# Altium PCB MC_SunSensorPCB.PcbDoc (part 2 of 2)
Units mm, origin at the board's own origin, x right, y up, seen from the top; angles counter-clockwise.
Board outline 90.17 x 95.88 mm, 4 copper layers (F.Cu, In1.Cu, In2.Cu, B.Cu); 111 components, 182 nets, 555 pads, 174 vias.
Unrouted connection lines stored in the file: 3.
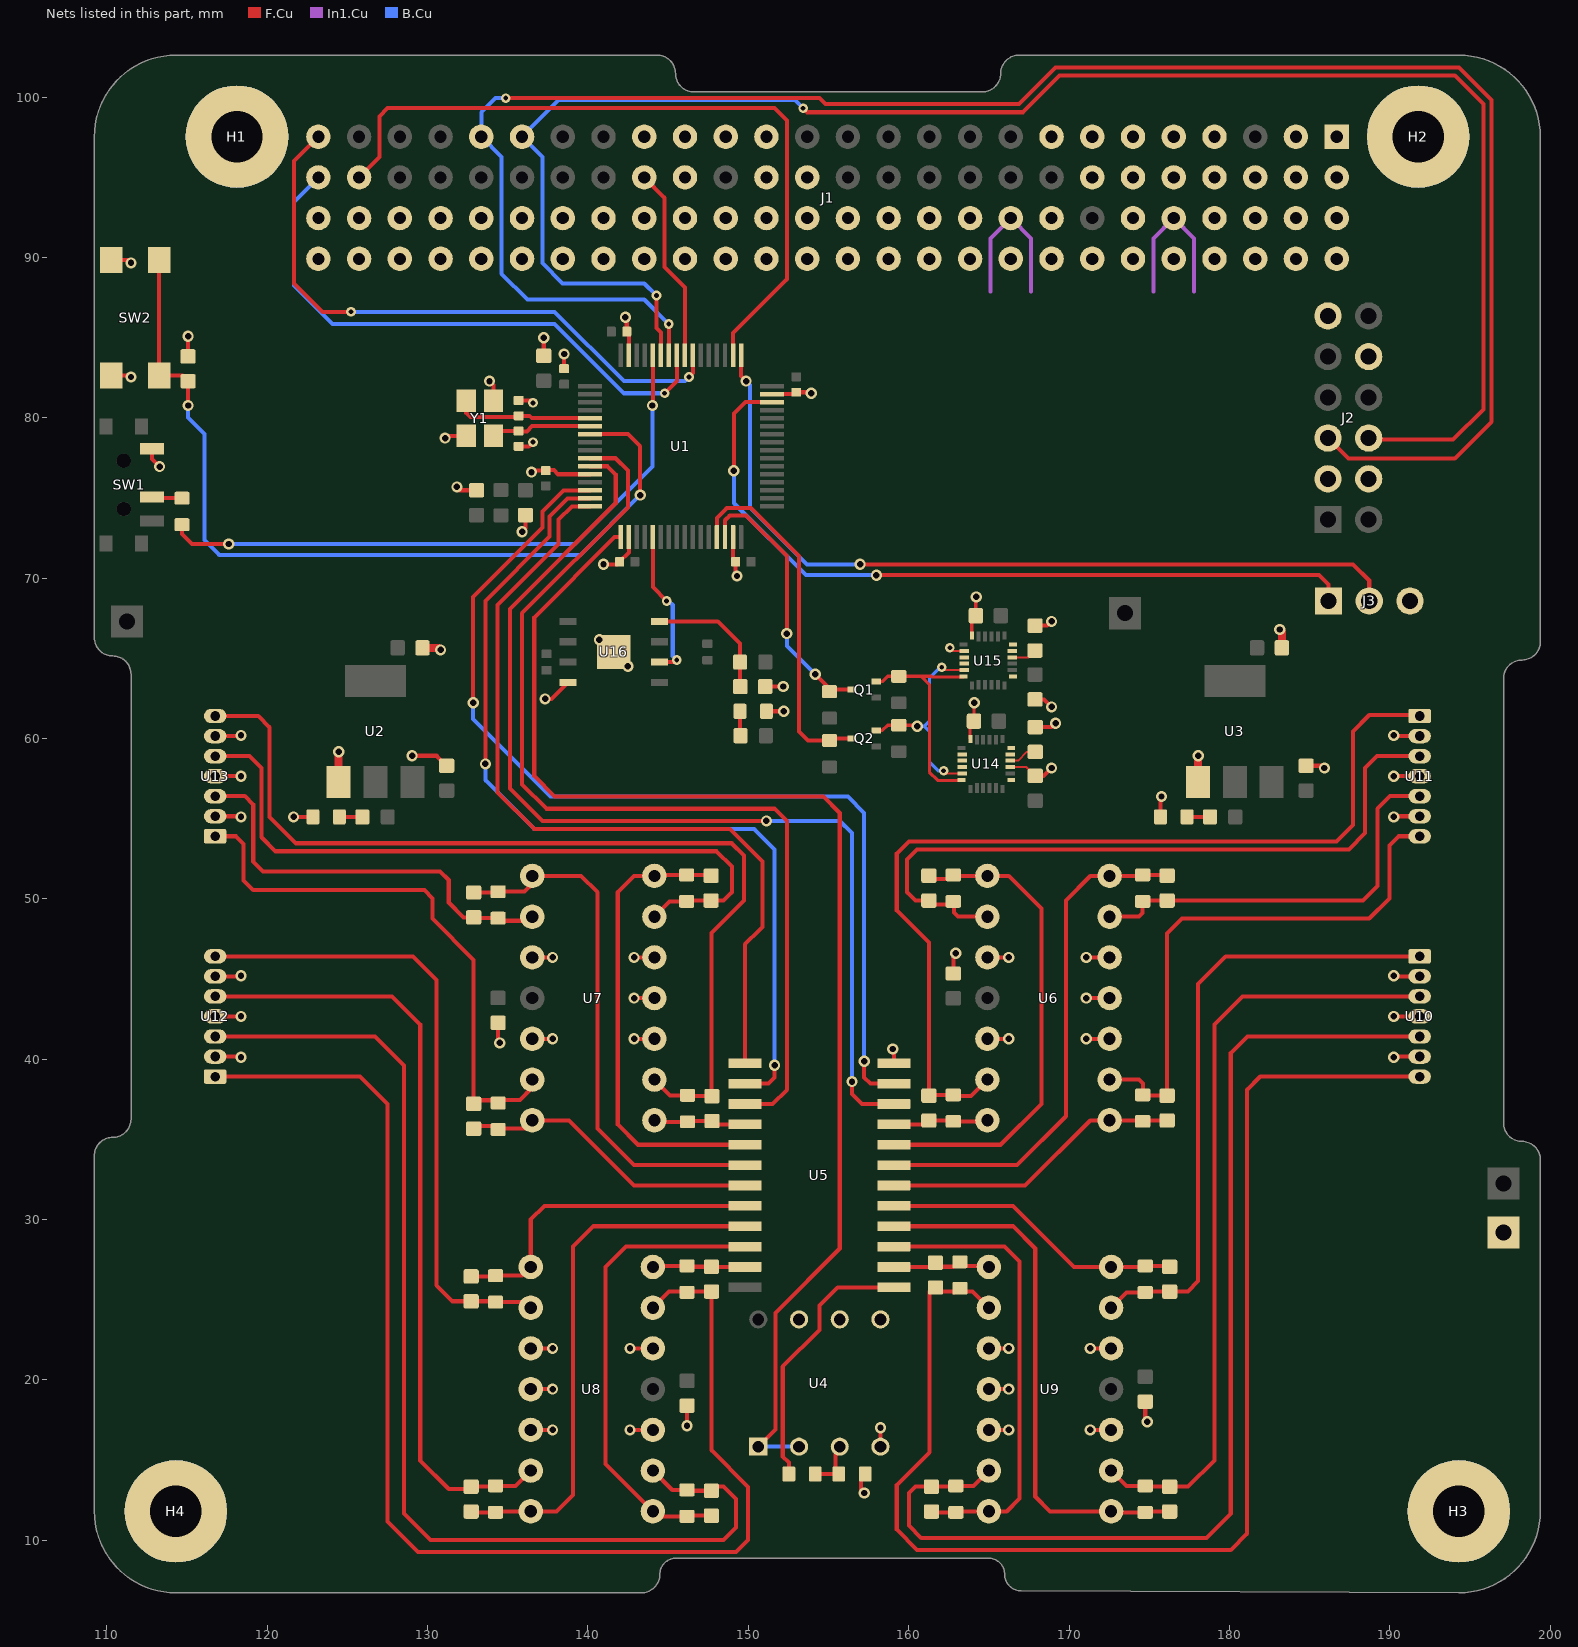
[diagram p4: the nets of this part, all layers, seen from the top]

## Via types
v1: diameter 0.7, hole 0.4, F.Cu to B.Cu, tented both sides, 140 vias
v2: diameter 0.6, hole 0.3, F.Cu to B.Cu, tented both sides, 34 vias

## Nets (pads, with @x,y where several pads share a name; then routed paths per layer and width w, separated by ;. In a path a pad name is that pad's centre, name@x,y a point inside that pad or via, vN(x,y) a via of type N, cw(c..) or ccw(c..) an arc to the next point about the centre after c; other vN are vias at no path point) (continued)
ADCS_SPI_MRAM_SCK: U1.21 U16.6 | length 9.5
  F.Cu w0.25: U16.6@144.455,64.763 145.415,64.763 v2(145.542,64.89)
  F.Cu w0.254: U1.21@144.046,72.555 144.046,69.434 v2(144.907,68.573)
  B.Cu w0.254: v2(144.907,68.573) 145.034,68.573 145.288,68.319 145.288,65.144 v2(145.542,64.89)
ADCS_SPI_MTR_CSN: J1.50 U1.50 | length 46.3
  F.Cu w0.254: J1.50@125.73,94.989 127,96.259 127,98.799 127.508,99.307 151.638,99.307 152.4,98.545 152.4,88.639 149.046,85.285 U1.50@149.046,83.895
ADCS_SPI_MTR_MISO: J1.36 U1.56 | length 12.1
  F.Cu w0.254: J1.36@143.51,94.989 144.78,93.719 144.78,89.401 146.046,88.135 U1.56@146.046,83.895
ADCS_SPI_MTR_MOSI: J1.52 U1.57 | length 35.9
  F.Cu w0.254: v2(144.78,81.527) 145.546,82.293 U1.57@145.546,83.895
  B.Cu w0.254: J1.52@123.19,94.989 121.666,93.465 121.666,88.258 124.079,85.845 137.922,85.845 142.24,81.527 v2(144.78,81.527)
ADCS_SPI_MTR_SCK: J1.51 U1.55 | length 38.5
  F.Cu w0.254: J1.51@123.19,97.529 121.666,96.005 121.666,88.385 123.444,86.607 v2(125.222,86.607) ; v2(146.304,82.543) 146.546,82.785 U1.55@146.546,83.895
  B.Cu w0.254: v2(125.222,86.607) 137.922,86.607 142.24,82.289 146.05,82.289 v2(146.304,82.543)
BOOT0: R1.2 U1.60 | length 39.1
  F.Cu w0.254: R1.2@114.681,73.336 114.681,72.764 115.316,72.129 v1(117.602,72.129) ; v1(144.018,80.765) 144.046,80.793 U1.60@144.046,83.895
  B.Cu w0.254: v1(117.602,72.129) 139.192,72.129 140.716,73.653 144.018,76.955 v1(144.018,80.765)
GND: C1.2 C2.2 C3.2 C4.2 C5.2 C6.2 C7.2 C8.2 C9.1 C10.2 C11.2 C12.2 C13.2 C14.2 C15.2 C16.2 C17.2 C22.2 C23.2 C24.2 C37.2 C38.2 C39.2 C40.2 C41.2 C42.2 C43.2 J1.61 J1.66 J1.69 J1.73 J1.74 J1.81 J1.82 J1.84 J1.99 J1.100 J2.3 J2.4 J2.11 J3.3 R2.1 R4.2 R5.1 R26.2 SW1.1 SW2.3 SW2.4 TP1.1 U1.12 U1.18 U1.31 U1.47 U1.63 U2.1 U3.1 U4.4 U5.12 U6.3 U6.5 U6.10 U6.11 U6.12 U7.3 U7.5 U7.10 U7.11 U7.12 U8.3 U8.5 U8.10 U8.11 U8.12 U9.3 U9.5 U9.10 U9.11 U9.12 U10.2 U10.4 U10.6 U11.2 U11.4 U11.6 U12.2 U12.4 U12.6 U13.2 U13.4 U13.6 U14.9 U14.18 U14.20 U15.18 U15.20 U16.4 U16.9 Y1.2 Y1.4 | length 131.9
  F.Cu w0.127: v2(162.573,65.652) 162.763,65.461 U15.20@163.464,65.461 ; U14.9@166.346,58.213 167.345,58.213 C39.2@167.894,57.664
  F.Cu w0.2: U14.18@163.821,59.965 163.821,60.83 C37.2@164.071,61.08 164.071,62.21 v1(164.084,62.223) ; U15.18@163.939,66.414 C38.2@163.939,67.405 ; C38.2@164.189,67.656 164.189,68.805 v1(164.211,68.827)
  F.Cu w0.25: v1(137.329,62.466) 137.728,62.466 U16.4@138.755,63.493
  F.Cu w0.254: SW2.3@110.26,82.634 111.414,82.635 v1(111.506,82.543) ; SW2.4@110.26,89.834 111.327,89.834 v1(111.506,89.655) ; SW1.1@112.809,78.062 112.809,77.43 v1(113.284,76.955) ; C1.2@115.062,83.826 v1(115.062,85.083) ; U12.2@116.748,40.165 118.324,40.165 v1(118.364,40.125) ; U12.4@116.748,42.665 v1(118.364,42.665) ; U12.6@116.748,45.165 118.324,45.165 v1(118.364,45.205) ; U13.2@116.748,55.151 118.324,55.151 v1(118.364,55.111) ; U13.4@116.748,57.651 v1(118.364,57.651) ; U13.6@116.748,60.151 118.324,60.151 v1(118.364,60.191) ; v1(121.641,55.111) R2.1@122.848,55.111 ; v1(129.032,58.921) 130.569,58.921 C6.2@131.191,58.299 ; v1(131.089,78.733) 131.222,78.866 Y1.4@132.412,78.866 ; v1(131.826,75.685) 132.031,75.48 C14.2@133.051,75.48 ; v1(133.858,82.289) 134.112,82.035 Y1.2@134.112,81.066 ; C22.2@134.398,42.271 134.398,41.109 v1(134.493,41.014) ; C10.2@135.675,78.216 136.309,78.216 v2(136.573,78.479) ; C13.2@135.675,81.081 136.42,81.081 v2(136.573,80.928) ; v1(135.89,72.891) 136.099,73.1 C12.2@136.099,73.93 ; U8.12@136.43,16.884 v1(137.795,16.884) ; U8.11@136.43,19.424 v1(137.795,19.424) ; U8.10@136.43,21.964 v1(137.795,21.964) ; v1(136.48,76.61) 136.579,76.709 C11.2@137.369,76.709 137.397,76.737 137.877,76.737 138.139,76.475 U1.12@140.126,76.475 ; U7.3@136.525,41.268 v1(137.795,41.268) ; U7.5@136.525,46.348 v1(137.795,46.348) ; C2.2@137.242,83.862 v1(137.242,84.992) ; C8.2@138.512,83.059 v1(138.512,83.976) ; v1(140.97,70.859) 141.806,70.859 C7.2@141.969,71.022 141.969,71.032 142.546,71.609 U1.18@142.546,72.555 ; v1(142.333,86.262) 142.421,86.174 C3.2@142.421,85.373 142.546,85.248 U1.63@142.546,83.895 ; v1(142.621,16.884) U8.5@144.05,16.884 ; v1(142.621,21.964) U8.3@144.05,21.964 ; v1(142.875,41.268) U7.10@144.145,41.268 ; v1(142.875,43.808) U7.11@144.145,43.808 ; v1(142.875,46.348) U7.12@144.145,46.348 ; v1(146.177,17.138) C23.2@146.177,18.395 ; U1.31@149.046,72.555 149.046,71.184 C5.2@149.208,71.022 149.208,70.221 v1(149.296,70.133) ; C43.2@151.048,63.239 v1(152.178,63.239) ; R26.2@151.129,61.696 v1(152.209,61.696) ; U1.47@151.466,81.475 152.874,81.475 C4.2@152.99,81.591 153.86,81.591 v1(153.924,81.527) ; R4.2@157.035,14.132 157.035,13.138 v1(157.226,12.947) ; U4.4@158.242,15.835 v1(158.242,17.011) ; v1(159.004,40.633) 159.072,40.565 U5.12@159.072,39.744 ; C17.2@162.783,45.345 162.783,46.444 v1(162.941,46.602) ; U6.3@164.91,41.268 v1(166.243,41.268) ; U6.5@164.91,46.348 v1(166.243,46.348) ; U9.12@165.005,16.884 v1(166.243,16.884) ; U9.11@165.005,19.424 v1(166.243,19.424) ; U9.10@165.005,21.964 v1(166.243,21.964) ; C40.2@167.885,62.436 168.444,62.435 v1(168.91,61.969) ; C42.2@167.885,67.034 168.641,67.034 v1(168.91,67.303) ; C39.2@167.894,57.664 168.415,57.664 v1(168.91,58.159) ; C41.2@167.894,60.712 168.923,60.712 v1(169.164,60.953) ; v1(171.069,41.268) U6.10@172.53,41.268 ; v1(171.069,43.808) U6.11@172.53,43.808 ; v1(171.069,46.348) U6.12@172.53,46.348 ; v1(171.323,16.884) U9.5@172.625,16.884 ; v1(171.323,21.964) U9.3@172.625,21.964 ; C24.2@174.752,18.649 174.752,17.519 v1(174.879,17.392) ; R5.1@175.705,55.111 175.705,56.318 v1(175.768,56.381) ; C15.2@184.785,58.299 185.788,58.299 v1(185.928,58.159) ; v1(190.246,40.125) 190.286,40.165 U10.6@191.862,40.165 ; v1(190.246,42.665) U10.4@191.862,42.665 ; v1(190.246,45.205) 190.286,45.165 U10.2@191.862,45.165 ; v1(190.246,55.111) 190.286,55.151 U11.6@191.862,55.151 ; v1(190.246,57.651) U11.4@191.862,57.651 ; v1(190.246,60.191) 190.286,60.151 U11.2@191.862,60.151
  F.Cu w0.508: U2.1@124.446,57.295 124.446,59.161 v1(124.46,59.175) ; C9.1@129.68,65.652 130.683,65.652 v1(130.81,65.525) ; U3.1@178.04,57.295 178.04,58.907 v1(178.054,58.921) ; v1(183.134,66.795) 183.274,66.655 C16.2@183.274,65.652
  In1.Cu w0.254: 165.1,87.877 165.1,91.179 J1.69@166.37,92.449 167.64,91.179 167.64,87.877 ; 175.26,87.877 175.26,91.179 J1.61@176.53,92.449 177.8,91.179 177.8,87.877
  other v1: 142.494,64.509 140.716,66.16
I2C1_SCL: J1.43 J2.5 U1.58 | length 121.3
  F.Cu w0.254: v2(134.874,99.934) 154.432,99.934 154.805,99.561 166.878,99.561 169.164,101.847 194.31,101.847 196.342,99.815 196.342,79.749 194.056,77.463 187.415,77.463 J2.5@186.145,78.733 ; v2(145.034,85.845) 145.046,85.833 U1.58@145.046,83.895
  B.Cu w0.254: v2(134.874,99.934) 134.231,99.934 133.35,99.053 J1.43@133.35,97.529 134.62,96.259 134.62,88.978 136.229,87.369 143.51,87.369 v2(145.034,85.845)
I2C1_SDA: J1.41 J2.6 U1.59 | length 110.1
  F.Cu w0.254: v2(144.272,87.623) 144.272,85.591 144.546,85.317 U1.59@144.546,83.895 ; v2(153.416,99.307) 153.67,99.053 167.132,99.053 169.418,101.339 194.056,101.339 195.834,99.561 195.834,80.511 193.954,78.631 J2.6@188.685,78.631
  B.Cu w0.254: v2(144.272,87.623) 143.51,88.385 138.414,88.385 137.16,89.639 137.16,96.259 J1.41@135.89,97.529 138.176,99.815 152.908,99.815 v2(153.416,99.307)
IMU_SCL_1V8: Q2.2 R24.1 U14.23 U15.23 | length 13.9
  F.Cu w0.127: v2(162.065,64.436) 162.24,64.261 U15.23@163.464,64.262 ; v2(162.179,57.987) 162.354,57.813 U14.23@163.346,57.813
  F.Cu w0.2: Q2.2@157.988,60.501 158.361,60.501 158.686,60.826 R24.1@159.385,60.826 160.465,60.826 v1(160.528,60.763)
  B.Cu w0.2: v2(162.065,64.436) 161.979,64.436 161.29,63.747 161.29,61.08 160.973,60.763 ; v2(162.179,57.987) 161.843,57.987 161.29,58.54 161.29,60.445 160.972,60.763 ; 160.972,60.763 v1(160.528,60.763) 160.973,60.763
IMU_SCL_3V3: Q2.3 R25.1 U1.29 | length 22.3
  F.Cu w0.254: U1.29@148.046,72.555 148.046,73.751 148.656,74.361 150.168,74.361 153.162,71.367 153.162,60.445 153.734,59.873 R25.1@155.067,59.873 155.195,60.001 Q2.3@156.464,60.001
IMU_SDA_1V8: Q1.2 R10.1 U14.24 U15.24 | length 15.4
  F.Cu w0.2: Q1.2@157.988,63.549 158.361,63.549 158.686,63.874 R10.1@159.385,63.874 ; U14.24@163.294,57.388 161.807,57.388 161.29,57.905 161.29,63.366 160.782,63.874 R10.1@159.385,63.874 ; U15.24@163.411,63.836 161.455,63.836 161.417,63.874 R10.1@159.385,63.874
IMU_SDA_3V3: Q1.3 R11.1 U1.30 | length 17.2
  F.Cu w0.254: U1.30@148.546,72.555 148.546,73.609 148.844,73.907 149.86,73.907 152.4,71.367 v1(152.4,66.541) ; v1(154.178,64.001) 155.067,63.112 R11.1@155.067,62.921 ; R11.1@155.003,62.985 R11.1@155.067,62.921 ; Q1.3@156.464,63.049 155.195,63.049 R11.1@155.067,62.921
  B.Cu w0.254: v1(152.4,66.541) 152.4,65.779 v1(154.178,64.001)
MuxEnable: U1.10 U5.15 | length 62.2
  F.Cu w0.254: U1.10@140.126,77.475 141.72,77.475 142.494,76.701 142.494,74.415 135.89,67.811 135.89,57.143 137.414,55.619 151.638,55.619 152.4,54.857 152.4,38.093 151.511,37.204 U5.15@149.792,37.204
MuxOut: U1.17 U4.1 U4.2 | length 81.5
  F.Cu w0.254: U1.17@142.046,72.555 141.65,72.555 136.652,67.557 136.652,57.651 137.922,56.381 154.686,56.381 155.702,55.365 155.702,28.187 151.692,24.177 151.692,16.905 U4.1@150.622,15.835
  B.Cu w0.254: U4.1@150.622,15.835 U4.2@153.162,15.835
MuxOut_1: R3.1 U5.1 | length 16.7
  F.Cu w0.254: R3.1@152.528,14.132 152.528,14.851 152.146,15.233 152.146,20.821 154.432,23.107 154.432,24.631 155.575,25.774 U5.1@159.072,25.774
MuxS0: U1.11 U5.10 | length 65.8
  F.Cu w0.254: U1.11@140.126,76.975 141.23,76.975 141.732,76.473 141.732,74.669 135.128,68.065 135.128,56.889 137.16,54.857 v1(151.13,54.857) ; v1(156.464,38.601) 156.464,37.839 157.099,37.204 U5.10@159.072,37.204
  B.Cu w0.254: v1(151.13,54.857) 155.702,54.857 156.464,54.095 v1(156.464,38.601)
MuxS1: U1.14 U5.11 | length 63.6
  F.Cu w0.254: v1(132.842,62.223) 132.842,68.827 137.16,73.145 137.16,74.161 138.474,75.475 U1.14@140.126,75.475 ; v1(157.226,39.871) 157.226,38.855 157.607,38.474 U5.11@159.072,38.474
  B.Cu w0.254: v1(132.842,62.223) 132.842,61.207 137.668,56.381 156.21,56.381 157.226,55.365 v1(157.226,39.871)
MuxS2: U1.15 U5.14 | length 57.1
  F.Cu w0.254: v1(133.604,58.413) 133.604,68.573 137.614,72.583 137.614,73.853 138.736,74.975 U1.15@140.126,74.975 ; U5.14@149.792,38.474 151.257,38.474 151.638,38.855 v1(151.638,39.617)
  B.Cu w0.254: v1(133.604,58.413) 133.604,57.397 136.652,54.349 150.368,54.349 151.638,53.079 v1(151.638,39.617)
MuxS3: U1.16 U5.13 | length 52.2
  F.Cu w0.254: U1.16@140.126,74.475 138.998,74.475 138.176,73.653 138.176,72.129 134.366,68.319 134.366,56.635 136.652,54.349 148.844,54.349 150.876,52.317 150.876,52.063 150.876,48.253 150.622,47.999 149.86,47.237 149.792,47.169 U5.13@149.792,39.744
Net-(C10-Pad1): C10.1 U1.6 Y1.1 | length 6.3
  F.Cu w0.254: Y1.1@134.112,78.866 134.422,79.176 C10.1@135.675,79.176 135.701,79.15 136.192,79.15 136.517,79.475 U1.6@140.126,79.475
Net-(C13-Pad1): C13.1 U1.5 Y1.3 | length 8.7
  F.Cu w0.254: Y1.3@132.412,81.066 132.412,80.308 132.681,80.039 135.593,80.039 C13.1@135.675,80.121 136.363,80.121 136.509,79.975 U1.5@140.126,79.975
Net-(C18-Pad1): C18.1 R6.1 U5.9 U6.1 | length 6
  F.Cu w0.254: U5.9@159.072,35.934 161.018,35.934 C18.1@161.259,36.175 162.733,36.175 R6.1@162.783,36.125 164.847,36.125 U6.1@164.91,36.188
Net-(C19-Pad1): C19.1 R7.2 U5.8 U6.7 | length 30.4
  F.Cu w0.254: U5.8@159.072,34.664 165.735,34.664 168.275,37.204 168.275,49.396 166.243,51.428 U6.7@164.91,51.428 162.974,51.428 162.783,51.237 161.309,51.237 C19.1@161.259,51.187
Net-(C20-Pad1): C20.1 R8.1 U5.7 U6.14 | length 32.4
  F.Cu w0.254: U5.7@159.072,33.394 166.751,33.394 169.799,36.442 169.799,49.904 171.323,51.428 U6.14@172.53,51.428 174.531,51.428 R8.1@174.594,51.491 176.068,51.491 C20.1@176.118,51.441
Net-(C21-Pad2): C21.2 R9.2 U5.6 U6.8 | length 18.8
  F.Cu w0.254: U5.6@159.072,32.124 167.259,32.124 171.323,36.188 U6.8@172.53,36.188 174.531,36.188 R9.2@174.594,36.125 174.644,36.175 C21.2@176.118,36.175
Net-(C25-Pad1): C25.1 R12.1 U5.19 U7.1 | length 18.7
  F.Cu w0.254: C25.1@132.874,35.89 132.924,35.84 134.398,35.84 134.558,35.68 U7.1@136.525,35.68 ; U7.1@136.525,36.188 138.811,36.188 142.875,32.124 U5.19@149.792,32.124
Net-(C26-Pad1): C26.1 R13.2 U5.18 U7.7 | length 33.2
  F.Cu w0.254: C26.1@132.874,50.394 134.348,50.394 R13.2@134.398,50.444 136.049,50.444 U7.7@136.525,50.92 ; U7.7@136.525,51.428 139.573,51.428 140.589,50.412 140.589,35.68 142.875,33.394 U5.18@149.792,33.394
Net-(C27-Pad1): C27.1 R14.1 U5.23 U8.1 | length 5.8
  F.Cu w0.254: U8.1@144.05,27.044 144.113,27.107 R14.1@146.177,27.107 146.227,27.057 C27.1@147.701,27.057 147.714,27.044 U5.23@149.792,27.044
Net-(C28-Pad1): C28.1 R15.2 U5.22 U8.7 | length 29.5
  F.Cu w0.254: C28.1@147.701,11.537 146.227,11.537 R15.2@146.177,11.487 144.367,11.487 U8.7@144.05,11.804 141.097,14.757 141.097,27.044 142.367,28.314 U5.22@149.792,28.314
Net-(C29-Pad1): C29.1 R16.1 U5.5 U9.1 | length 18.8
  F.Cu w0.254: U5.5@159.072,30.854 166.497,30.854 170.307,27.044 U9.1@172.625,27.044 174.689,27.044 R16.1@174.752,27.107 176.226,27.107 C29.1@176.276,27.057
Net-(C30-Pad1): C30.1 R17.2 U5.4 U9.7 | length 33.7
  F.Cu w0.254: U5.4@159.072,29.584 166.497,29.584 167.894,28.187 167.894,12.725 168.815,11.804 U9.7@172.625,11.804 172.688,11.741 R17.2@174.752,11.741 174.802,11.791 C30.1@176.276,11.791
Net-(C31-Pad1): C31.1 R18.1 U5.17 U7.14 | length 29.3
  F.Cu w0.254: R18.1@146.089,51.428 R18.1@146.152,51.491 ; C31.1@147.676,51.441 147.626,51.491 R18.1@146.152,51.491 ; U5.17@149.792,34.664 143.129,34.664 141.859,35.934 141.859,50.412 142.875,51.428 U7.14@144.145,51.428 144.208,51.491 R18.1@146.152,51.491
Net-(C32-Pad2): C32.2 R19.2 U5.16 U7.8 | length 6.4
  F.Cu w0.254: U7.8@144.145,35.68 U7.8@144.56,36.094 ; U7.8@144.145,36.188 144.238,36.094 R19.2@146.209,36.094 146.259,36.144 C32.2@147.733,36.144 147.943,35.934 U5.16@149.792,35.934
Net-(C33-Pad1): C33.1 R20.1 U5.21 U8.14 | length 33.6
  F.Cu w0.254: C33.1@132.715,11.791 132.765,11.741 R20.1@134.239,11.741 134.302,11.804 U8.14@136.43,11.804 138.049,11.804 139.065,12.82 139.065,28.314 140.335,29.584 U5.21@149.792,29.584
Net-(C34-Pad2): C34.2 R21.2 U5.20 U8.8 | length 20.6
  F.Cu w0.254: C34.2@132.715,26.452 134.189,26.452 R21.2@134.239,26.502 135.888,26.502 U8.8@136.43,27.044 136.43,29.997 137.287,30.854 U5.20@149.792,30.854
Net-(C35-Pad1): C35.1 R22.1 U5.3 U9.14 | length 28.9
  F.Cu w0.254: U5.3@159.072,28.314 165.989,28.314 166.92,27.383 166.92,12.608 166.116,11.804 U9.14@165.005,11.804 163.004,11.804 R22.1@162.941,11.741 161.467,11.741 C35.1@161.417,11.791
Net-(C36-Pad2): C36.2 R23.2 U5.2 U9.8 | length 6
  F.Cu w0.254: U5.2@159.072,27.044 161.277,27.044 161.29,27.057 162.764,27.057 162.814,27.107 164.942,27.107 U9.8@165.005,27.044
Net-(C41-Pad1): C41.1 U14.10 | length 1.8
  F.Cu w0.127: U14.10@166.346,58.613 166.824,58.613 167.373,59.162 C41.1@167.894,59.162
Net-(C42-Pad1): C42.1 U15.10 | length 1.6
  F.Cu w0.127: U15.10@166.464,65.062 167.463,65.062 C42.1@167.885,65.484
Net-(C43-Pad1): C43.1 FB2.2 U16.8 | length 8.3
  F.Cu w0.254: U16.8@144.455,67.303 148.095,67.303 149.485,65.912 FB2.2@149.485,64.763 149.485,63.251 C43.1@149.498,63.239
Net-(D1-Pad1): D1.1 R2.2 | length 1.4
  F.Cu w0.254: R2.2@124.498,55.111 D1.1@125.933,55.111
Net-(D2-Pad1): D2.1 R5.2 | length 1.4
  F.Cu w0.254: R5.2@177.355,55.111 D2.1@178.791,55.111
Net-(D3-Pad1): D3.1 R26.1 | length 1.5
  F.Cu w0.254: R26.1@149.479,61.696 149.479,60.21 D3.1@149.517,60.172
Net-(R3-Pad2): R3.2 R4.1 U4.3 | length 3.2
  F.Cu w0.254: R3.2@153.987,14.132 155.385,14.132 155.448,14.195 155.448,15.581 U4.3@155.702,15.835
NRST: C1.1 SW2.1 SW2.2 U1.7 | length 55.1
  F.Cu w0.254: SW2.2@113.26,89.834 SW2.1@113.26,82.634 114.703,82.635 C1.1@115.062,82.276 v1(115.062,80.765) ; U1.7@140.126,78.975 142.506,78.975 143.256,78.225 v1(143.256,75.177)
  B.Cu w0.254: v1(115.062,80.765) 115.062,80.003 116.078,78.987 116.078,72.383 117.009,71.452 139.531,71.452 v1(143.256,75.177)
PD1_O1: C18.2 R6.2 U6.2 U11.1 | length 59.7
  F.Cu w0.254: U6.2@164.91,38.728 163.894,37.712 162.846,37.712 R6.2@162.783,37.775 161.309,37.775 C18.2@161.259,37.725 161.259,47.268 159.258,49.269 159.258,52.825 160.02,53.587 186.69,53.587 187.706,54.603 187.706,60.445 188.722,61.461 191.802,61.461 U11.1@191.862,61.401
PD1_O2: C29.2 R16.2 U9.2 U10.1 | length 39.2
  F.Cu w0.254: U9.2@172.625,24.504 173.578,25.457 R16.2@174.752,25.457 174.802,25.507 C29.2@176.276,25.507 177.406,25.507 178.054,26.155 178.054,44.697 179.772,46.415 U10.1@191.862,46.415
PD1_O3: C27.2 R14.2 U8.2 U12.1 | length 81.6
  F.Cu w0.254: U12.1@116.748,38.915 125.797,38.915 127.508,37.204 127.508,11.169 129.413,9.264 149.225,9.264 149.987,10.026 149.987,13.328 147.701,15.614 C27.2@147.701,25.507 146.227,25.507 R14.2@146.177,25.457 146.114,25.52 145.066,25.52 U8.2@144.05,24.504
PD1_O4: C25.2 R12.2 U7.2 U13.1 | length 34.4
  F.Cu w0.254: U13.1@116.748,53.901 118.05,53.901 118.522,53.429 118.522,51.143 119.126,50.539 129.794,50.539 130.302,50.031 130.302,48.761 132.874,46.189 C25.2@132.874,37.217 ; C25.2@132.874,37.44 134.348,37.44 134.398,37.49 134.431,37.458 135.763,37.458 U7.2@136.525,38.22
PD2_O1: C19.2 R7.1 U6.6 U11.3 | length 44.8
  F.Cu w0.254: C19.2@161.259,49.637 162.733,49.637 162.814,49.556 162.814,49.142 163.068,48.888 U6.6@164.91,48.888 ; C19.2@161.259,49.891 160.414,49.891 159.893,50.412 159.893,52.444 160.528,53.079 187.452,53.079 188.468,54.095 188.468,58.159 189.21,58.901 U11.3@191.862,58.901
PD2_O2: C30.2 R17.1 U9.6 U10.3 | length 48.2
  F.Cu w0.254: U9.6@172.625,14.344 173.578,13.391 R17.1@174.752,13.391 174.802,13.341 C30.2@176.276,13.341 177.432,13.341 179.07,14.979 179.07,42.157 180.828,43.915 U10.3@191.862,43.915
PD2_O3: C28.2 R15.1 U8.6 U12.3 | length 70
  F.Cu w0.254: U12.3@116.748,41.415 126.726,41.415 128.524,39.617 128.524,11.677 130.175,10.026 148.463,10.026 149.225,10.788 149.225,12.566 148.45,13.341 C28.2@147.701,13.341 ; U8.6@144.05,14.344 145.257,13.137 R15.1@146.177,13.137 146.227,13.087 C28.2@147.701,13.087
PD2_O4: C26.2 R13.1 U7.6 U13.3 | length 26
  F.Cu w0.254: U13.3@116.748,56.401 118.598,56.401 119.126,55.873 119.126,52.317 119.728,51.715 130.772,51.715 131.318,51.169 131.318,49.777 132.251,48.844 C26.2@132.874,48.844 132.924,48.794 R13.1@134.398,48.794 134.558,48.634 136.271,48.634 U7.6@136.525,48.38
PD3_O1: C20.2 R8.2 U6.13 U11.5 | length 25.7
  F.Cu w0.254: U6.13@172.53,48.888 174.371,48.888 174.594,49.111 R8.2@174.594,49.841 174.644,49.891 C20.2@176.118,49.891 188.328,49.891 189.23,50.793 189.23,55.619 190.012,56.401 U11.5@191.862,56.401
PD3_O2: C35.2 R22.2 U9.13 U10.5 | length 69.5
  F.Cu w0.254: U9.13@165.005,14.344 164.052,13.391 R22.2@162.941,13.391 162.891,13.341 C35.2@161.417,13.341 160.414,13.341 160.02,12.947 160.02,10.915 160.782,10.153 178.562,10.153 180.086,11.677 180.086,40.379 181.122,41.415 U10.5@191.862,41.415
PD3_O3: C33.2 R20.2 U8.13 U12.5 | length 48.8
  F.Cu w0.254: U12.5@116.748,43.915 127.782,43.915 129.54,42.157 129.54,14.979 131.318,13.201 132.575,13.201 C33.2@132.715,13.341 134.189,13.341 R20.2@134.239,13.391 135.477,13.391 U8.13@136.43,14.344
PD3_O4: C31.2 R18.2 U7.13 U13.5 | length 44.7
  F.Cu w0.254: U13.5@116.748,58.901 118.892,58.901 119.634,58.159 119.634,53.841 120.51,52.965 148.022,52.965 148.971,52.016 148.971,50.412 148.45,49.891 C31.2@147.676,49.891 146.202,49.891 R18.2@146.152,49.841 145.098,49.841 U7.13@144.145,48.888
PD4_O1: C21.1 R9.1 U6.9 U11.7 | length 34.8
  F.Cu w0.254: U6.9@172.53,38.728 174.371,38.728 174.625,38.474 174.625,37.806 R9.1@174.594,37.775 174.644,37.725 C21.1@176.118,37.725 176.118,47.841 177.038,48.761 188.722,48.761 189.992,50.031 189.992,53.333 190.56,53.901 U11.7@191.862,53.901
PD4_O2: C36.1 R23.1 U9.9 U10.7 | length 81.4
  F.Cu w0.254: U9.9@165.005,24.504 163.989,25.52 162.877,25.52 162.814,25.457 162.764,25.507 161.29,25.507 161.29,15.487 159.258,13.455 159.258,10.661 160.528,9.391 180.086,9.391 181.102,10.407 181.102,38.093 181.924,38.915 U10.7@191.862,38.915
PD4_O3: C34.1 R21.1 U8.9 U12.7 | length 39.9
  F.Cu w0.254: U12.7@116.748,46.415 127.314,46.415 129.092,46.415 130.556,44.951 130.556,25.901 131.554,24.903 C34.1@132.715,24.903 134.189,24.903 R21.1@134.239,24.853 136.082,24.853 U8.9@136.43,24.504
PD4_O4: C32.1 R19.1 U7.9 U13.7 | length 59.8
  F.Cu w0.254: U13.7@116.748,61.401 119.44,61.401 120.142,60.699 120.142,55.111 121.788,53.465 148.966,53.465 149.733,52.698 149.733,49.904 147.701,47.872 147.701,37.727 C32.1@147.733,37.694 146.259,37.694 R19.1@146.209,37.744 ; U7.9@144.145,38.728 145.129,37.744 R19.1@146.209,37.744 ; R19.1@146.177,37.777 R19.1@146.209,37.744
SW_BOOT0: R1.1 SW1.2 | length 1.9
  F.Cu w0.254: SW1.2@112.809,75.062 112.885,74.986 R1.1@114.681,74.986
SYS_JTCK-SWCLK: J3.2 U1.49 | length 51.5
  F.Cu w0.254: U1.49@149.546,83.895 149.546,82.603 v1(149.86,82.289) ; v1(156.972,70.859) 187.706,70.859 188.722,69.843 J3.2@188.722,68.573
  B.Cu w0.254: v1(149.86,82.289) 150.114,82.035 150.114,74.415 153.67,70.859 v1(156.972,70.859)
SYS_JTMS-SWDIO: J3.1 U1.46 | length 48.5
  F.Cu w0.254: v1(149.098,76.701) 149.098,80.257 149.816,80.975 U1.46@151.466,80.975 ; v1(157.988,70.182) 185.589,70.182 186.182,69.589 J3.1@186.182,68.573
  B.Cu w0.254: v1(149.098,76.701) 149.098,74.669 153.585,70.182 v1(157.988,70.182)
unconnected-(H1-Pad1): H1.1
unconnected-(H2-Pad1): H2.1
unconnected-(H3-Pad1): H3.1
unconnected-(H4-Pad1): H4.1
unconnected-(J1-Pad1): J1.1
unconnected-(J1-Pad2): J1.2
unconnected-(J1-Pad3): J1.3
unconnected-(J1-Pad4): J1.4
unconnected-(J1-Pad6): J1.6
unconnected-(J1-Pad7): J1.7
unconnected-(J1-Pad8): J1.8
unconnected-(J1-Pad9): J1.9
unconnected-(J1-Pad10): J1.10
unconnected-(J1-Pad11): J1.11
unconnected-(J1-Pad12): J1.12
unconnected-(J1-Pad13): J1.13
unconnected-(J1-Pad14): J1.14
unconnected-(J1-Pad15): J1.15
unconnected-(J1-Pad28): J1.28
unconnected-(J1-Pad29): J1.29
unconnected-(J1-Pad30): J1.30
unconnected-(J1-Pad31): J1.31
unconnected-(J1-Pad33): J1.33
unconnected-(J1-Pad34): J1.34
unconnected-(J1-Pad35): J1.35
unconnected-(J1-Pad53): J1.53
unconnected-(J1-Pad54): J1.54
unconnected-(J1-Pad55): J1.55
unconnected-(J1-Pad56): J1.56
unconnected-(J1-Pad57): J1.57
unconnected-(J1-Pad58): J1.58
unconnected-(J1-Pad59): J1.59
unconnected-(J1-Pad60): J1.60
unconnected-(J1-Pad62): J1.62
unconnected-(J1-Pad63): J1.63
unconnected-(J1-Pad64): J1.64
unconnected-(J1-Pad67): J1.67
unconnected-(J1-Pad68): J1.68
unconnected-(J1-Pad70): J1.70
unconnected-(J1-Pad71): J1.71
unconnected-(J1-Pad72): J1.72
unconnected-(J1-Pad75): J1.75
unconnected-(J1-Pad76): J1.76
unconnected-(J1-Pad77): J1.77
unconnected-(J1-Pad78): J1.78
unconnected-(J1-Pad79): J1.79
unconnected-(J1-Pad80): J1.80
unconnected-(J1-Pad83): J1.83
unconnected-(J1-Pad85): J1.85
unconnected-(J1-Pad86): J1.86
unconnected-(J1-Pad87): J1.87
unconnected-(J1-Pad88): J1.88
unconnected-(J1-Pad89): J1.89
unconnected-(J1-Pad90): J1.90
unconnected-(J1-Pad91): J1.91
unconnected-(J1-Pad92): J1.92
unconnected-(J1-Pad93): J1.93
unconnected-(J1-Pad94): J1.94
unconnected-(J1-Pad95): J1.95
unconnected-(J1-Pad96): J1.96
unconnected-(J1-Pad97): J1.97
unconnected-(J1-Pad98): J1.98
unconnected-(J1-Pad101): J1.101
unconnected-(J1-Pad102): J1.102
unconnected-(J1-Pad103): J1.103
unconnected-(J1-Pad104): J1.104
unconnected-(J2-Pad10): J2.10
unconnected-(U4-Pad5): U4.5
unconnected-(U4-Pad6): U4.6
unconnected-(U4-Pad7): U4.7
unconnected-(U14-Pad7): U14.7
unconnected-(U14-Pad11): U14.11
unconnected-(U14-Pad12): U14.12
unconnected-(U14-Pad21): U14.21
unconnected-(U14-Pad22): U14.22
unconnected-(U15-Pad7): U15.7
unconnected-(U15-Pad11): U15.11
unconnected-(U15-Pad12): U15.12
unconnected-(U15-Pad21): U15.21
unconnected-(U15-Pad22): U15.22
pads on no net: SW1.Un1 SW1.Un2 SW1.Un3 SW1.Un4 SW1.Un5 SW1.Un6 U14.1 U14.2 U14.3 U14.4 U14.5 U14.6 U14.14 U14.15 U14.16 U14.17 U14.19 U15.1 U15.2 U15.3 U15.4 U15.5 U15.6 U15.14 U15.15 U15.16 U15.17 U15.19

## Polygon pours and split planes (outlines as drawn)
+5V on F.Cu "F.Cu-+5V-1" (solid, remove dead copper, pour order 3): 132.334,53.841 128.27,53.841 128.27,58.413 130.302,58.413 130.302,57.397 132.334,57.397
+3V3 on F.Cu "F.Cu-+3V3" (solid, remove dead copper, pour order 2): 128.778,64.509 123.19,64.509 123.19,66.541 128.778,66.541
+5V on F.Cu "F.Cu-+5V" (solid, remove dead copper, pour order 1): 183.642,57.397 185.42,57.397 185.42,54.095 181.864,54.095 181.864,58.413 183.642,58.413
1.8V on F.Cu "F.Cu-1.8V" (solid, remove dead copper, pour order 0): 182.372,62.477 178.308,62.477 178.308,66.541 182.372,66.541
GND on In1.Cu "In1.Cu-GND" (solid, remove dead copper, pour order 4): 200.025,6.724 109,6.724 109,102.599 200.152,102.599
+3V3 on In2.Cu "In2.Cu-+3V3" (solid, remove dead copper, pour order 7): 155.956,74.669 187.198,74.669 187.198,72.383 155.956,72.383 155.956,54.095 132.842,54.095 132.834,59.683 128.016,59.683 128.016,54.095 108.966,54.095 108.966,102.609 155.956,102.609
1.8V on In2.Cu "In2.Cu-1.8V" (solid, remove dead copper, pour order 6): 187.198,59.683 181.356,59.683 181.356,54.095 156.972,54.095 156.972,71.367 187.198,71.367
+5V on In2.Cu "In2.Cu-+5V" (solid, remove dead copper, pour order 5): 199.898,6.597 108.966,6.597 108.966,53.079 128.27,53.079 128.27,55.873 132.334,55.873 132.334,53.079 181.864,53.079 181.864,56.127 185.674,56.127 185.674,53.079 187.706,53.079 187.706,75.685 156.972,75.685 156.972,102.609 200.152,102.609 199.898,53.079

## Keep-outs
Edge.Cuts:
  lines w0.1: 109.22,11.804 ccw(c114.3,11.804) 114.3,6.724 ; 109.22,11.804 ccw(c114.3,11.804) 114.3,6.724 ; 109.22,11.804 109.22,33.983 ; 109.22,11.804 109.22,33.983 ; 109.22,33.983 cw(c110.363,33.983) 110.363,35.126 ; 109.22,33.983 cw(c110.363,33.983) 110.363,35.126 ; 109.22,66.287 ccw(c110.363,66.287) 110.363,65.144 ; 109.22,66.287 ccw(c110.363,66.287) 110.363,65.144 ; 109.22,66.287 109.22,97.529 ; 109.22,66.287 109.22,97.529 ; 109.22,97.529 cw(c114.3,97.529) 114.3,102.609 ; 109.22,97.529 cw(c114.3,97.529) 114.3,102.609 ; 110.363,35.126 ccw(c110.363,36.269) 111.506,36.269 ; 110.363,35.126 ccw(c110.363,36.269) 111.506,36.269 ; 110.363,65.144 cw(c110.363,64.001) 111.506,64.001 ; 110.363,65.144 cw(c110.363,64.001) 111.506,64.001 ; 111.506,36.269 111.506,64.001 ; 111.506,36.269 111.506,64.001 ; 114.3,6.724 143.337,6.724 ; 114.3,6.724 143.337,6.724 ; 114.3,102.609 144.318,102.609 ; 114.3,102.609 144.318,102.609 ; 143.337,6.724 ccw(c143.337,7.867) 144.48,7.867 ; 143.337,6.724 ccw(c143.337,7.867) 144.48,7.867 ; 144.318,102.609 cw(c144.318,101.466) 145.461,101.466 ; 144.318,102.609 cw(c144.318,101.466) 145.461,101.466 ; 144.48,7.867 cw(c145.498,7.864) 145.498,8.883 ; 144.48,7.867 cw(c145.498,7.864) 145.498,8.883 ; 145.461,101.466 ccw(c146.604,101.466) 146.604,100.323 ; 145.461,101.466 ccw(c146.604,101.466) 146.604,100.323 ; 145.498,8.883 164.973,8.883 ; 145.498,8.883 164.973,8.883 ; 146.604,100.323 164.592,100.323 ; 146.604,100.323 164.592,100.323 ; 164.592,100.323 ccw(c164.592,101.466) 165.735,101.466 ; 164.592,100.323 ccw(c164.592,101.466) 165.735,101.466 ; 164.973,8.883 cw(c164.973,7.867) 165.989,7.867 ; 164.973,8.883 cw(c164.973,7.867) 165.989,7.867 ; 165.735,101.466 cw(c166.878,101.466) 166.878,102.609 ; 165.735,101.466 cw(c166.878,101.466) 166.878,102.609 ; 165.989,7.867 ccw(c167.005,7.867) 167.005,6.851 ; 165.989,7.867 ccw(c167.005,7.867) 167.005,6.851 ; 166.878,102.609 194.31,102.609 ; 166.878,102.609 194.31,102.609 ; 167.005,6.851 194.31,6.724 ; 167.005,6.851 194.31,6.724 ; 194.31,6.724 ccw(c194.31,11.804) 199.39,11.804 ; 194.31,6.724 ccw(c194.31,11.804) 199.39,11.804 ; 194.31,102.609 cw(c194.31,97.529) 199.39,97.529 ; 194.31,102.609 cw(c194.31,97.529) 199.39,97.529 ; 197.104,36.015 ccw(c198.247,36.015) 198.247,34.872 ; 197.104,36.015 ccw(c198.247,36.015) 198.247,34.872 ; 197.104,36.015 197.104,63.747 ; 197.104,36.015 197.104,63.747 ; 197.104,63.747 cw(c198.247,63.747) 198.247,64.89 ; 197.104,63.747 cw(c198.247,63.747) 198.247,64.89 ; 198.247,34.872 cw(c198.247,33.729) 199.39,33.729 ; 198.247,34.872 cw(c198.247,33.729) 199.39,33.729 ; 198.247,64.89 ccw(c198.247,66.033) 199.39,66.033 ; 198.247,64.89 ccw(c198.247,66.033) 199.39,66.033 ; 199.39,11.804 199.39,33.729 ; 199.39,11.804 199.39,33.729 ; 199.39,66.033 199.39,97.529 ; 199.39,66.033 199.39,97.529

## Silkscreen, mask and mechanical layers (free items; w line width, h text height)
F.SilkS:
  circle w0.15: c186.944,100.069 r0.568
  lines w0.15: 180.657,12.947 187.642,12.947 ; 138.557,62.858 144.653,62.858 144.653,67.938 139.192,67.938 138.557,67.303 138.557,62.858
  text "H2" at 188.698,90.137 h1
  text "GND|CHG" at 180.168,85.707 h1
  text "IO3|X" at 179.844,83.294 h1
  text "IO1|IO2" at 180.361,80.881 h1
  text "SCL|SDA" at 180.331,78.341 h1
  text "GND|GND" at 180.13,75.547 h1
  text "3V3|5V0" at 180.297,73.007 h1
  text "GND" at 191.546,65.037 h1 r90
  text "SWDIO" at 186.72,63.989 h1 r90
  text "SWCLK" at 189.006,63.991 h1 r90
  text "MRAM" at 141.1,60.928 h1
  text "IMUs" at 164.591,54.829 h1
  text "SS Connector 4" at 115.807,51.015 h1
  text "SS Connector 1" at 189.254,51.015 h1
  text "SS OpAmp 1" at 169.036,42.252 h1 r90
  text "SS OpAmp 4" at 140.842,42.21 h1 r90
  text "SS Connector 3" at 115.819,36.029 h1
  text "SS Connector 2" at 189.218,36.029 h1
  text "SS OpAmp 3" at 140.588,17.839 h1 r90
  text "SS OpAmp 2" at 169.036,17.832 h1 r90
  text "Irritator" at 183.052,13.6 h1.27
  text "SS Analog MUX" at 152.649,10.533 h1
  text "ADCS-CTL-REV-A" at 126.686,7.506 h1.27
B.SilkS:
  circle w0.15: c174.371,28.949 r0.254
  circle w0.15: c163.068,34.41 r0.254
  circle w0.15: c134.747,34.537 r0.254
  circle w0.15: c145.796,28.949 r0.254
  region: 174.47,29.188 174.554,29.132 174.61,29.048 174.63,28.949 174.61,28.85 174.554,28.766 174.47,28.71 174.371,28.69 174.272,28.71 174.188,28.766 174.132,28.85 174.112,28.949 174.132,29.048 174.188,29.132 174.272,29.188 174.371,29.208
  region: 163.167,34.649 163.251,34.593 163.307,34.509 163.327,34.41 163.307,34.311 163.251,34.227 163.167,34.171 163.068,34.151 162.969,34.171 162.885,34.227 162.829,34.311 162.809,34.41 162.829,34.509 162.885,34.593 162.969,34.649 163.068,34.669
  region: 134.846,34.776 134.93,34.72 134.986,34.636 135.006,34.537 134.986,34.438 134.93,34.354 134.846,34.298 134.747,34.278 134.648,34.298 134.564,34.354 134.508,34.438 134.488,34.537 134.508,34.636 134.564,34.72 134.648,34.776 134.747,34.796
  region: 145.895,29.188 145.979,29.132 146.035,29.048 146.055,28.949 146.035,28.85 145.979,28.766 145.895,28.71 145.796,28.69 145.697,28.71 145.613,28.766 145.557,28.85 145.537,28.949 145.557,29.048 145.613,29.132 145.697,29.188 145.796,29.208
  lines w0.15: 181.483,17.011 191.008,17.011 ; 193.167,20.821 198.247,20.821 ; 180.34,15.36 180.34,23.615 199.009,23.615 199.009,15.423 180.34,15.36
  text "Yasin Shahrami / Tony Jajcanin / Aidan Darling / Hatim Belhadjhamida / Luke Parna-Gile / Alex MacQuarrie / Dylan Burke / Sid Arya / Aidan Sheedy" at 128.517,22.519 h1
  text "ptd-db" at 196.328,21.588 h1
  text "Alex MacQuarrie" at 196.301,19.761 h0.51
  text "Ankylosaurus" at 187.562,17.774 h1
  text "SN:_______________" at 124.377,7.446 h1.27

## Dimensions
199.898,102.609 to 199.898,42.665 on User.1
108.966,102.609 to 108.966,42.665 on User.1
108.966,102.609 to 108.966,57.651 on User.1
199.898,102.609 to 199.898,57.651 on User.1
199.39,6.724 to 194.31,6.724 on F.Fab
199.39,6.724 to 199.39,11.804 on F.Fab
109.22,102.609 to 109.22,97.529 on F.Fab
109.22,102.609 to 199.39,102.609 on F.Fab
109.22,10.915 to 199.39,10.915 on F.Fab
109.22,10.534 to 154.305,10.534 on F.Fab
109.22,102.609 to 118.11,102.609 on F.Fab
109.22,6.724 to 114.3,6.724 on F.Fab
109.22,102.609 to 109.22,6.724 on F.Fab
109.22,102.609 to 191.77,102.609 on F.Fab
109.22,6.724 to 109.22,11.804 on F.Fab

## Text inside footprints (layer, text, board x,y; h text height)
J1: F.SilkS "H1" at 188.861,93.569 h1